# Altium PCB LASER_EXT_V1.1.0.PcbDoc
Units mm, origin at the board's own origin, x right, y up, seen from the top; angles counter-clockwise.
Board outline 35.5 x 54.5 mm, 2 copper layers (Top Layer, Bottom Layer); 39 components, 23 nets, 234 pads, 84 vias.
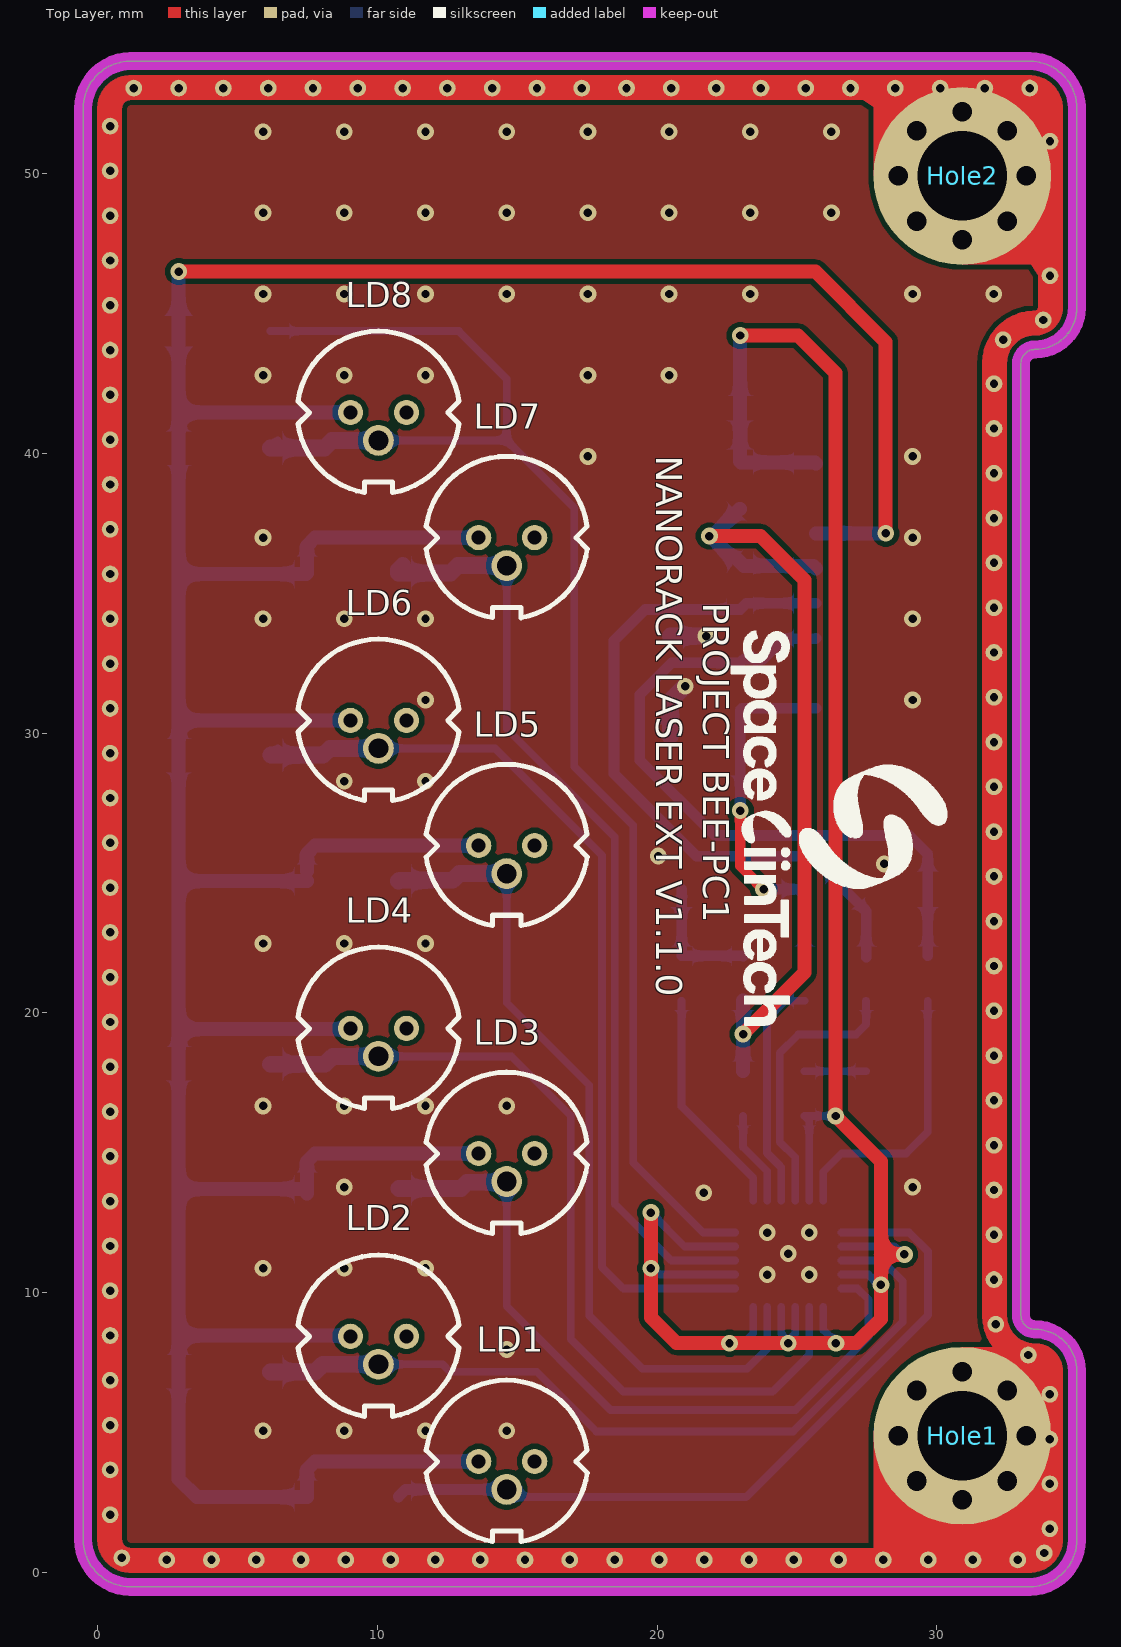
[diagram p0: Top Layer view]
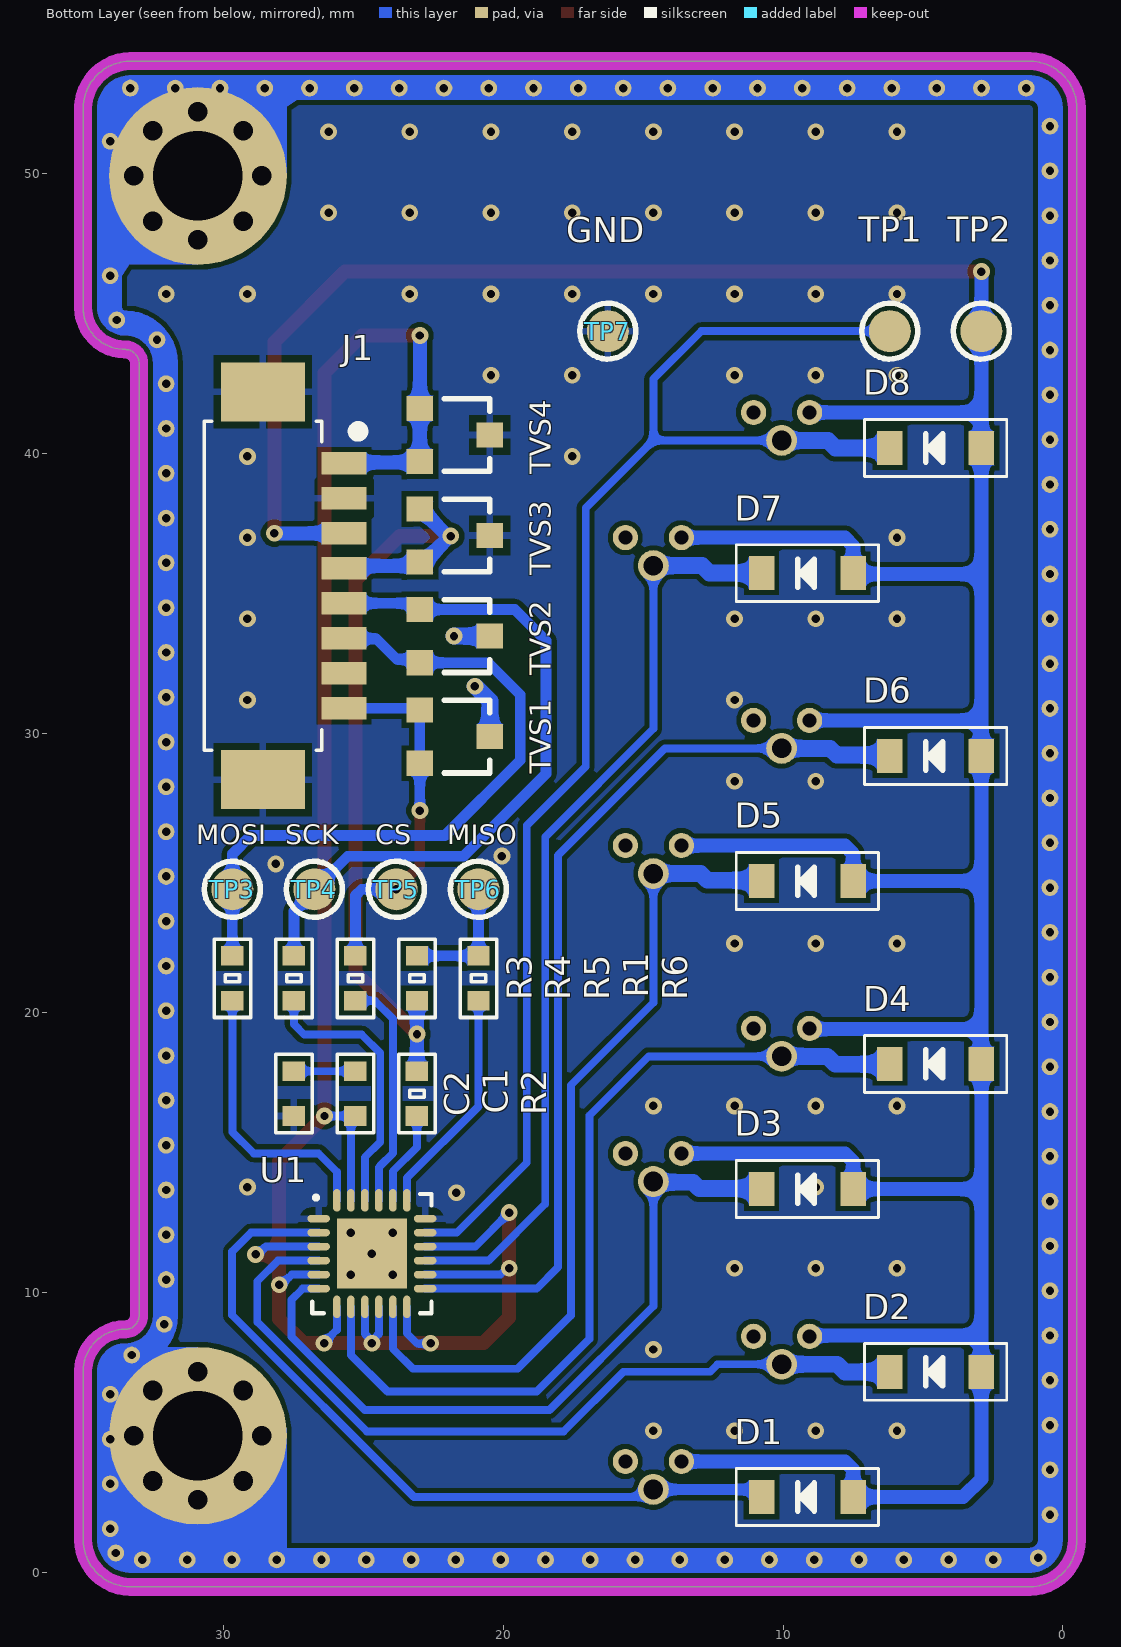
[diagram p1: Bottom Layer view, seen from below]
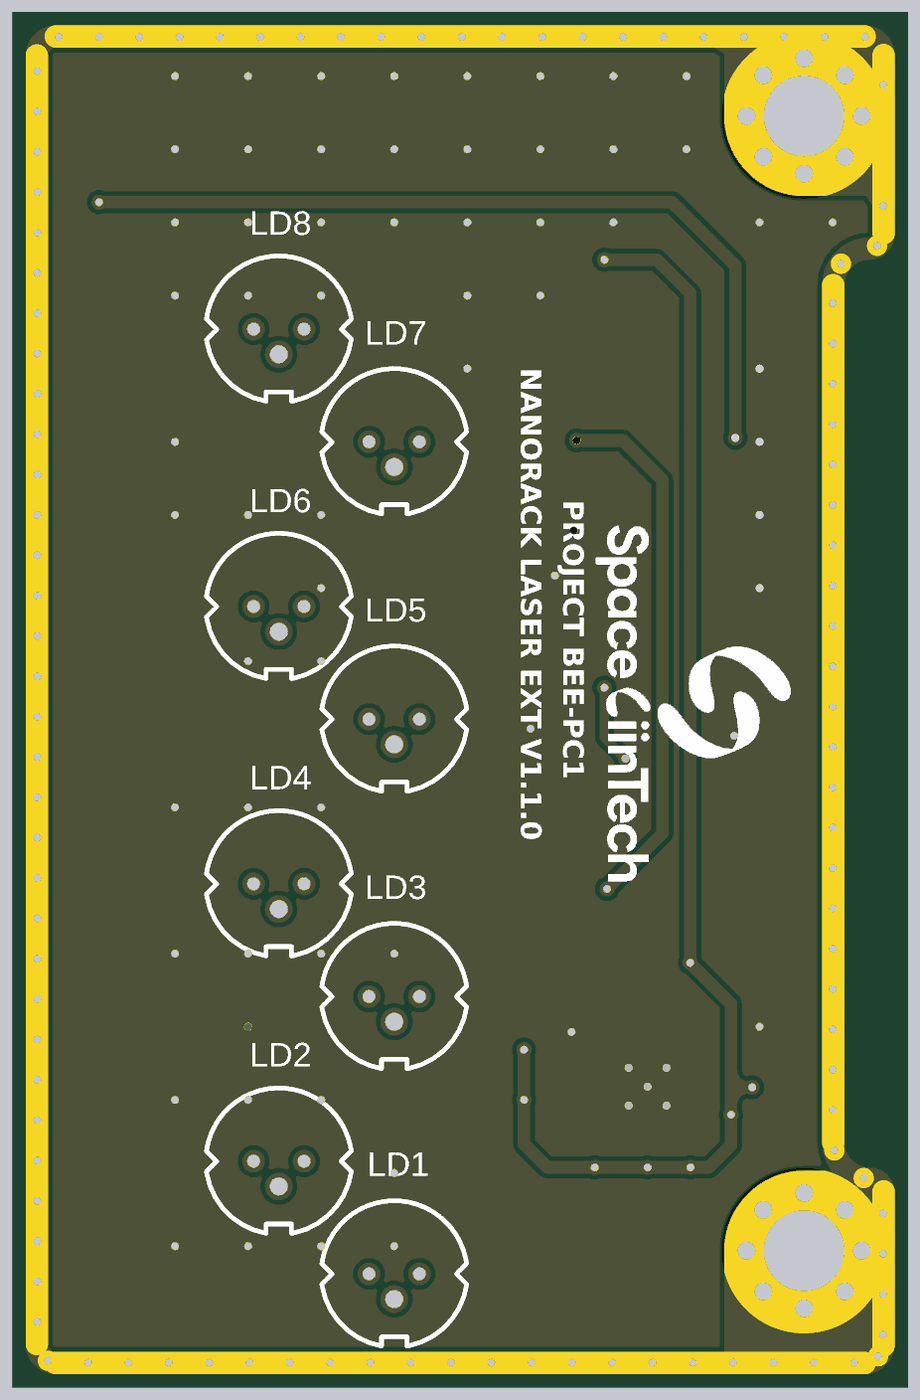
[diagram p2: 3D render of the assembled board from above, using the file's embedded part models]
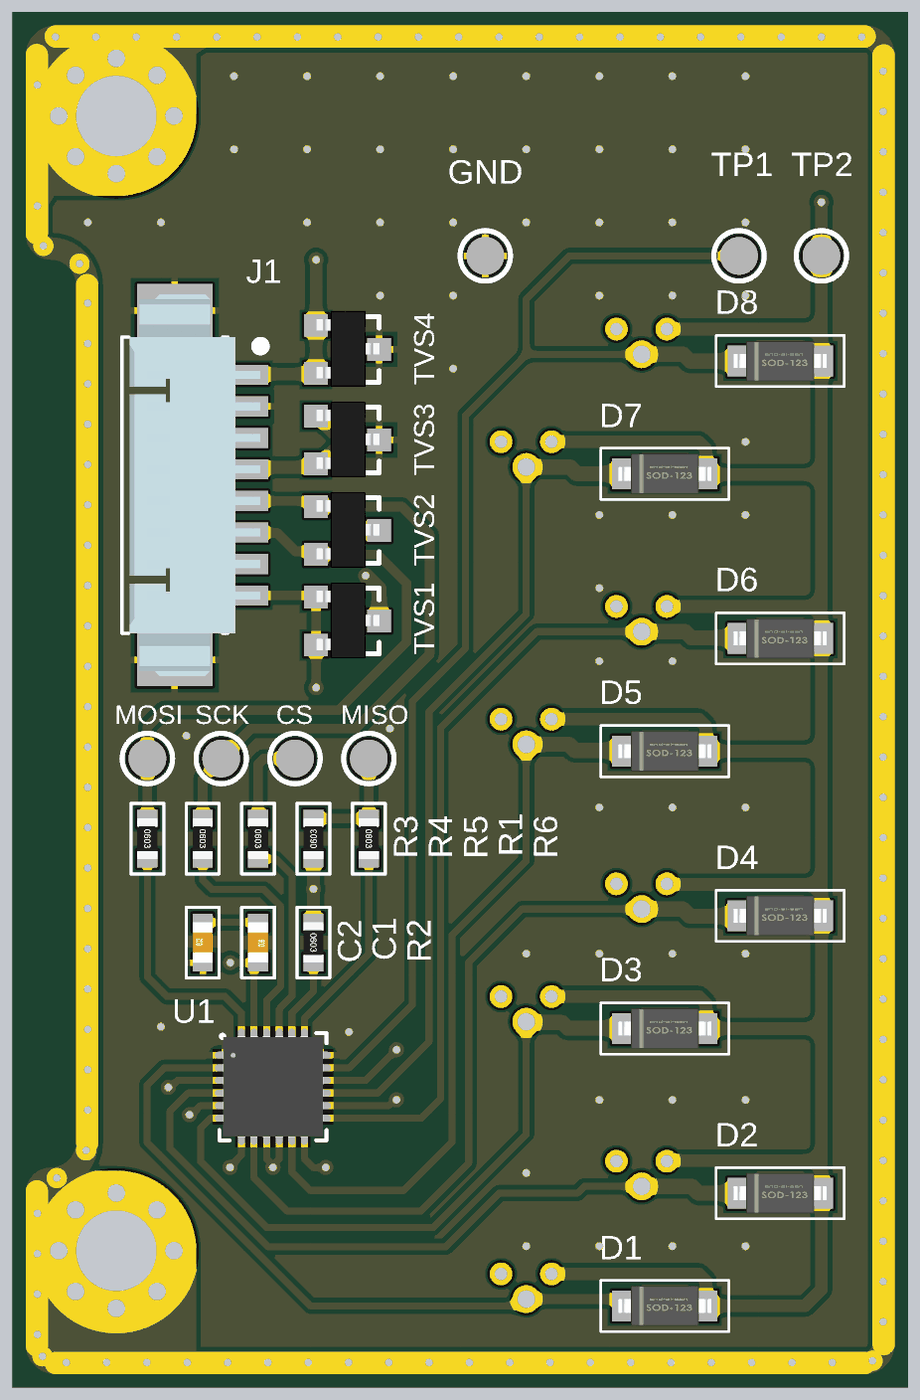
[diagram p3: 3D render of the assembled board from below, using the file's embedded part models]

## Layer stack, top to bottom
Top Solder: solder mask 0.0102, Solder Resist, Dk 3.5
Top Layer: signal copper 0.0356
Dielectric 1: dielectric 0.32, FR-4, Dk 4.8
Bottom Layer: signal copper 0.0356
Bottom Solder: solder mask 0.0102, Solder Resist, Dk 3.5

## Board outline
-0.5,1.2 ccw(c1.2,1.2) 1.2,-0.5 33.3,-0.5 ccw(c33.3,1.2) 35,1.2 34.998,1.113 34.998,7.259 cw(c34.999,7.259) 34.999,7.26 35,7.2 ccw(c33.5,7.2) 33.5,8.7 cw(c33.5,9.2) 33,9.2 33,43.19 33,43.2 cw(c33.5,43.2) 33.499,43.7 33.5,43.7 ccw(c33.5,45.2) 35,45.2 35,45.176 35,52.399 ccw(c34.997,52.399) 34.997,52.402 35,52.3 ccw(c33.3,52.3) 33.3,54 1.2,54 ccw(c1.2,52.3) -0.5,52.3

## Design rules (kind name [scope] priority, off if disabled: settings)
Clearance [NOT InNet('PROTECT_EMI') and NOT OnLayer('Keep-Out Layer')] p1: gap=0.178 ignorepadtopadclearanceinfootprint=TRUE
HoleSize [All] p1: absolutevalues=TRUE maxlimit=3.2 minlimit=0.025 maxpercent=80.000 minpercent=20.000
MinimumSolderMaskSliver [All] p1: minsoldermaskwidth=0.14
PolygonConnect [All] p1: thpad.connectstyle=Relief thpad.reliefconductorwidth=0.254 thpad.reliefentries=4 thpad.polygonreliefangle="90 Angle" thpad.airgapwidth=0.254 smdpad.connectstyle=Relief smdpad.reliefconductorwidth=0.254 smdpad.reliefentries=4 smdpad.polygonreliefangle="90 Angle" smdpad.airgapwidth=0.254 via.connectstyle=Direct via.reliefconductorwidth=0.254 via.reliefentries=4 via.polygonreliefangle="90 Angle" via.airgapwidth=0.254
RoutingVias [All] p1: holewidth=0.3 width=0.7 viastyle="Through Hole" minholewidth=0.3 minwidth=0.6 maxholewidth=0.711 maxwidth=1.27
SilkToSolderMaskClearance [IsPad] p1: minsilkscreentomaskgap=0.15 clearancetoexposedcopper=TRUE
SolderMaskExpansion [All] p1: expansion=0.102 istentingtop=FALSE
Width [All] p1: maxlimit=1.27 minlimit=0.178 preferedwidth=0.381
27 further rules are at their usual default settings.

## Classes and differential pairs
component class COMMUNICATION: Hole1 Hole2 J1 TVS1 TVS2 TVS3 TVS4
component class SWITCHING: C1 C2 D1 D2 D3 D4 D5 D6 D7 D8 LD1 LD2 LD3 LD4 LD5 LD6 LD7 LD8 q R1 R2 R3 R4 R5 R6 TP1 TP2 TP3 TP4 TP5 TP6 TP7 U1

## Components (designator, comment, footprint, x,y, rotation, side; value= is the part's Value field where it differs from the comment)
C1 "0.22uF/25V" CN-SMD-0603 25.272,17.121 r270 bottom value=33pF
C2 "0.22uF/25V" CN-SMD-0603 27.47,17.12 r90 bottom value=33pF
D1 "1N4148W-TP" SOD123 9.13,2.71 r180 bottom value=1N5007
D2 "1N4148W-TP" SOD123 4.55,7.18 r180 bottom value=1N5007
D3 "1N4148W-TP" SOD123 9.13,13.71 r180 bottom value=1N5007
D4 "1N4148W-TP" SOD123 4.55,18.18 r180 bottom value=1N5007
D5 "1N4148W-TP" SOD123 9.13,24.71 r180 bottom value=1N5007
D6 "1N4148W-TP" SOD123 4.55,29.18 r180 bottom value=1N5007
D7 "1N4148W-TP" SOD123 9.13,35.71 r180 bottom value=1N5007
D8 "1N4148W-TP" SOD123 4.55,40.18 r180 bottom value=1N5007
Hole1 "Hole" "Hole space" 30.9,4.9 r0 top
Hole2 "Hole" "Hole space" 30.9,49.9 r0 top
J1 "0532610871" 0532610871 28.579,35.26 r270 bottom
LD1 "LaserDiode" LASER 14.63,3.98 r90 top
LD2 "LaserDiode" LASER 10.05,8.45 r90 top
LD3 "LaserDiode" LASER 14.63,14.98 r90 top
LD4 "LaserDiode" LASER 10.05,19.45 r90 top
LD5 "LaserDiode" LASER 14.63,25.98 r90 top
LD6 "LaserDiode" LASER 10.05,30.45 r90 top
LD7 "LaserDiode" LASER 14.63,36.98 r90 top
LD8 "LaserDiode" LASER 10.05,41.45 r90 top
R1 "4.7K 1%" RES-SMD-0603 23.075,21.238 r90 bottom
R2 "4.7K 1%" RES-SMD-0603 23.076,17.121 r270 bottom
R3 "22R 1%" RES-SMD-0603 29.667,21.239 r270 bottom
R4 "22R 1%" RES-SMD-0603 27.47,21.239 r270 bottom
R5 "22R 1%" RES-SMD-0603 25.273,21.239 r270 bottom
R6 "22R 1%" RES-SMD-0603 20.879,21.239 r270 bottom
TP1 "Test-Point" TESTPOINT 6.185,44.354 r180 bottom
TP2 "Test-Point" TESTPOINT 2.915,44.354 r180 bottom
TP3 "Test-Point" TESTPOINT 29.667,24.418 r0 bottom
TP4 "Test-Point" TESTPOINT 26.738,24.418 r0 bottom
TP5 "Test-Point" TESTPOINT 23.808,24.418 r0 bottom
TP6 "Test-Point" TESTPOINT 20.879,24.418 r0 bottom
TP7 "Test-Point" TESTPOINT 16.256,44.354 r180 bottom
TVS1 "S2303" SOT23-123 21.721,29.87 r270 bottom
TVS2 "S2303" SOT23-123 21.721,33.462 r270 bottom
TVS3 "S2303" SOT23-123 21.721,37.054 r270 bottom
TVS4 "S2312" SOT23-123 21.721,40.645 r270 bottom
U1 "ADG1414BCPZ" ADG1414BCPZ 24.685,11.405 r180 bottom

## Footprints (in the part's own frame and the unit in brackets; to place one, negate y for a bottom-side part, rotate by r counter-clockwise, add the part's x,y. Pads: shape width x height; smd on the part's side, far side on the other; paste and mask are expansions set on the pad)
0532610871 [mm] "CONN HEADER SMD R/A 8POS 1.25MM"
  rect 0.8x1.6 smd: 1(-4.375,2.9) 2(-3.125,2.9) 3(-1.875,2.9) 4(-0.625,2.9) 5(0.625,2.9) 6(1.875,2.9) 7(3.125,2.9) 8(4.375,2.9)
  rect 2.1x3 smd: S1(-6.925,0) S2(6.925,0)
  silkscreen extent -5.87,-2.1 5.87,3.58, body extent -7.57,-1.8 7.57,3.4, height 3.2
ADG1414BCPZ [mm] "IC SW SPST-NOX8 11.5OHM 24LFCSP"
  rrect100% 0.805x0.275 smd mask+0.05: 1(-1.902,1.25) 2(-1.902,0.75) 3(-1.902,0.25) 4(-1.902,-0.25) 5(-1.902,-0.75) 6(-1.902,-1.25) 13(1.902,-1.25) 14(1.902,-0.75) 15(1.902,-0.25) 16(1.902,0.25) 17(1.902,0.75) 18(1.902,1.25)
  rrect100% 0.275x0.805 smd mask+0.05: 7(-1.25,-1.902) 8(-0.75,-1.902) 9(-0.25,-1.902) 10(0.25,-1.902) 11(0.75,-1.902) 12(1.25,-1.902) 19(1.25,1.902) 20(0.75,1.902) 21(0.25,1.902) 22(-0.25,1.902) 23(-0.75,1.902) 24(-1.25,1.902)
  rect 2.5x2.5 smd mask+0.102: HTAB(0,0)
  silkscreen extent -2.13,-2.13 2.13,2.13, body extent -2,-2 2,2, height 0.6
CN-SMD-0603 [mm]
  rect 0.7x0.8 smd: 1(-0.8,0) 2(0.8,0)
  silkscreen extent -1.4,-0.65 1.4,0.65, body extent -0.8,-0.4 0.8,0.4, height 0.3
"Hole space" [mm]
  round 1 hole 0.7: 1(-2.286,0) 1(-1.616,-1.616) 1(-1.616,1.616) 1(0,-2.286) 1(0,2.286) 1(1.616,-1.616) 1(1.616,1.616) 1(2.286,0)
  round 6.35 hole 3.2: 1(0,0)
LASER [mm]
  round 1.1 hole 0.7 mask+0.102: 1(-1,0)
  round 0.9 hole 0.5 mask+0.102: 2(0,-1) 3(0,1)
  silkscreen extent -2.86,-2.88 2.9,2.87, body extent -2.76,-2.78 2.8,2.77, height 3.7
RES-SMD-0603 [mm]
  rect 0.7x0.8 smd: 1(-0.8,0) 2(0.8,0)
  silkscreen extent -1.4,-0.65 1.4,0.65, body extent -0.8,-0.4 0.8,0.4, height 0.43
SOD123 [mm]
  rect 0.91x1.22 smd: 1(1.635,0) 2(-1.635,0)
  silkscreen extent -2.54,-1.02 2.54,1.02, body extent -1.85,-0.8 1.85,0.8, height 1.25
SOT23-123 [mm] "SOT23, 1=bottom-left, 2=top, 3=bottom-right"
  rect 0.9x0.95 smd: 1(-0.95,-1.25) 2(0,1.25) 3(0.95,-1.25)
  silkscreen extent -1.3,-0.38 1.3,1.25, body extent -1.52,-1.23 1.48,1.27, height 1.06
TESTPOINT [mm]
  round 1.5 smd: 1(0,0)
  silkscreen extent -1,-1 1,1

## Part data
C1 C2: library part CN, "CAP CER 0.22UF 25V X7R 0603"
D1 D2 D3 D4 D5 D6 D7 D8: library part "Diode SMD", "DIODE STANDARD 100V 150MA SOD123", Code - JEDEC=DO-214-AB, Published=8-Jun-2000, Publisher="Altium Limited", Revision="July-2002: Re-released for DXP Platform."
J1: library part "Header8 - Shield", "CONN HEADER SMD R/A 8POS 1.25MM"
LD1 LD2 LD3 LD4 LD5 LD6 LD7 LD8: library part LD
R1 R2: library part Res-SMD, "RES SMD 4.7K OHM 1% 1/10W 0603", Manufacturer="Generic Components", Class=Passive, Published=08/06/2000, Publisher="Altium Hobart Technology Centre"
R3 R4 R5 R6: library part Res-SMD, "Resistor", Manufacturer="Generic Components", Class=Passive, Published=08/06/2000, Publisher="Altium Hobart Technology Centre"
TVS1 TVS2 TVS3: "TVS DIODE 3.3VWM 8VC SOT233"
TVS4: library part S2315, "TVS DIODE 12VWM 19VC SOT233"
U1: "IC SW SPST-NOX8 11.5OHM 24LFCSP"

## Free pads (board coordinates)
  round 0.6 hole 0.3: 1(0.464,2.078) 1(0.464,3.678) 1(0.464,5.278) 1(0.464,6.878) 1(0.464,8.478) 1(0.464,10.078) 1(0.464,11.678) 1(0.464,13.278) 1(0.464,14.878) 1(0.464,16.478) 1(0.464,18.078) 1(0.464,19.678) 1(0.464,21.278) 1(0.464,22.878) 1(0.464,24.478) 1(0.464,26.078) 1(0.464,27.678) 1(0.464,29.278) 1(0.464,30.878) 1(0.464,32.478) 1(0.464,34.078) 1(0.464,35.678) 1(0.464,37.278) 1(0.464,38.878) 1(0.464,40.478) 1(0.464,42.078) 1(0.464,43.678) 1(0.464,45.278) 1(0.464,46.878) 1(0.464,48.478) 1(0.464,50.078) 1(0.464,51.678) 1(0.886,0.535) 1(1.311,53.036) 1(2.484,0.464) 1(2.911,53.036) 1(4.084,0.464) 1(4.511,53.036) 1(5.684,0.464) 1(6.111,53.036) 1(7.284,0.464) 1(7.711,53.036) 1(8.884,0.464) 1(9.311,53.036) 1(10.484,0.464) 1(10.911,53.036) 1(12.084,0.464) 1(12.511,53.036) 1(13.684,0.464) 1(14.111,53.036) 1(15.284,0.464) 1(15.711,53.036) 1(16.884,0.464) 1(17.311,53.036) 1(18.484,0.464) 1(18.911,53.036) 1(20.084,0.464) 1(20.511,53.036) 1(21.684,0.464) 1(22.111,53.036) 1(23.284,0.464) 1(23.711,53.036) 1(24.884,0.464) 1(25.311,53.036) 1(26.484,0.464) 1(26.911,53.036) 1(28.084,0.464) 1(28.511,53.036) 1(29.684,0.464) 1(30.111,53.036) 1(31.284,0.464) 1(31.711,53.036) 1(32.036,10.477) 1(32.036,12.077) 1(32.036,13.677) 1(32.036,15.277) 1(32.036,16.877) 1(32.036,18.477) 1(32.036,20.077) 1(32.036,21.677) 1(32.036,23.277) 1(32.036,24.877) 1(32.036,26.477) 1(32.036,28.077) 1(32.036,29.677) 1(32.036,31.277) 1(32.036,32.877) 1(32.036,34.477) 1(32.036,36.077) 1(32.036,37.677) 1(32.036,39.277) 1(32.036,40.877) 1(32.036,42.477) 1(32.1,8.878) 1(32.362,44.043) 1(32.884,0.464) 1(33.265,7.781) 1(33.311,53.037) 1(33.796,44.752) 1(33.833,0.711) 1(34.033,1.578) 1(34.033,3.178) 1(34.033,4.778) 1(34.033,6.378) 1(34.035,46.334) 1(34.035,51.134)

## Via types
v1: diameter 0.6, hole 0.3, Top Layer to Bottom Layer, tented both sides, 84 vias

## Nets (pads, with @x,y where several pads share a name; then routed paths per layer and width w, separated by ;. In a path a pad name is that pad's centre, name@x,y a point inside that pad or via, vN(x,y) a via of type N, cw(c..) or ccw(c..) an arc to the next point about the centre after c; other vN are vias at no path point)
12V_EXP: C1.2 J1.1 TVS4.1 TVS4.3 U1.3 U1.5 U1.7 U1.9 U1.10 U1.12 U1.14 U1.16 U1.23 | length 80.1
  Top Layer w0.5: v1(19.78,12.871) v1(19.78,10.883) 19.78,9.125 20.701,8.204 v1(24.685,8.204) v1(26.391,8.204) 27.126,8.204 27.997,9.075 v1(27.997,10.294) 27.997,11.377 ; v1(22.971,44.2) 25.043,44.2 26.377,42.866 v1(26.377,16.321) 27.997,14.7 27.997,11.377 ; v1(28.837,11.377) 27.997,11.377
  Bottom Layer w0.279: v1(19.78,10.883) 19.866,10.883 20.095,10.655 U1.14 ; v1(19.78,12.871) 20.996,11.655 U1.16 ; v1(22.588,8.204) 22.603,8.189 23.061,8.189 23.435,8.563 U1.12 ; U1.10 24.435,8.541 v1@24.685,8.291 ; v1(24.685,8.204) v1@24.685,8.291 ; U1.9 24.935,8.541 v1@24.685,8.291 ; U1.23 25.435,16.158 C1.2 v1(26.377,16.321) ; U1.7 25.935,8.681 26.391,8.225 v1(26.391,8.204) ; U1.5 27.55,10.655 27.911,10.294 v1(27.997,10.294) ; U1.3 28.473,11.655 28.75,11.377 v1(28.837,11.377)
  Bottom Layer w0.5: v1(22.971,44.2) TVS4.1 TVS4.3 23.001,39.665 25.649,39.665 J1.1
+3.3: J1.4 R1.1 R2.1 TVS3.1 TVS3.3 | length 29.5
  Top Layer w0.5: v1(21.869,37.033) 23.7,37.033 25.273,35.46 25.273,21.443 v1(23.075,19.246)
  Bottom Layer w0.5: TVS3.1 22.946,38.004 21.994,37.052 21.889,37.052 v1(21.869,37.033) 21.895,37.033 22.625,36.304 22.771,36.304 23.104,35.97 25.594,35.97 J1.4 ; R2.1 v1(23.075,19.246) R1.1@23.075,20.437
GND: C2.1 J1.2 J1.S1 J1.S2 TP7.1 TVS1.2 TVS2.2 TVS3.2 TVS4.2 U1.1 U1.18 U1.HTAB | length 3.3
  Bottom Layer w0.6: TVS1.2 20.471,31.139 v1(21.006,31.674) ; TVS2.2 v1(21.753,33.462)
  other v1: 5.93,5.08 8.83,5.08 11.73,5.08 14.63,5.08 14.63,7.98 23.935,10.655 25.435,10.655 5.93,10.88 8.83,10.88 11.73,10.88 24.685,11.405 23.935,12.155 25.435,12.155 21.666,13.575 8.83,13.78 29.13,13.78 5.93,16.68 8.83,16.68 11.73,16.68 14.63,16.68 5.93,22.48 8.83,22.48 11.73,22.48 28.118,25.324 20.041,25.603 8.83,28.28 11.73,28.28 11.73,31.18 29.13,31.18 5.93,34.08 8.83,34.08 11.73,34.08 29.13,34.08 5.93,36.98 29.13,36.98 17.53,39.88 29.13,39.88 5.93,42.78 8.83,42.78 11.73,42.78 17.53,42.78 20.43,42.78 5.93,45.68 8.83,45.68 11.73,45.68 14.63,45.68 17.53,45.68 20.43,45.68 23.33,45.68 29.13,45.68 32.03,45.68 5.93,48.58 8.83,48.58 11.73,48.58 14.63,48.58 17.53,48.58 20.43,48.58 23.33,48.58 26.23,48.58 5.93,51.48 8.83,51.48 11.73,51.48 14.63,51.48 17.53,51.48 20.43,51.48 23.33,51.48 26.23,51.48
I_LD_EXT: D1.1 D2.1 D3.1 D4.1 D5.1 D6.1 D7.1 D8.1 J1.3 LD1.3 LD2.3 LD3.3 LD4.3 LD5.3 LD6.3 LD7.3 LD8.3 TP2.1 | length 148.3
  Top Layer w0.5: v1(2.915,46.482) 25.654,46.482 28.169,43.967 v1(28.169,37.135)
  Bottom Layer w0.5: v1(2.915,46.482) TP2.1 2.915,41.45 ; D7.1@7.463,35.678 2.915,35.678 ; D3.1@7.495,13.555 7.495,14.687 7.788,14.98 LD3.3@13.36,14.98 ; D3.1 2.915,13.71 ; D5.1 2.915,24.71 ; D5.1@7.495,25.07 7.495,25.687 7.788,25.98 LD5.3@13.36,25.98 ; D7.1 7.495,36.687 7.788,36.98 LD7.3@13.36,36.98 ; LD6.3@8.75,30.45 2.915,30.45 ; LD2.3@8.752,8.478 2.915,8.478 ; LD4.3@8.752,19.422 2.915,19.422 ; LD8.3@8.773,41.45 2.915,41.45 ; LD1.3@13.36,3.98 7.788,3.98 7.495,3.687 D1.1 3.564,2.71 2.915,3.359 D2.1 2.915,8.478 ; J1.3 v1(28.169,37.135) ; 2.915,8.478 2.915,13.71 ; 2.915,13.71 D4.1 2.915,19.422 ; 2.915,19.422 2.915,24.71 ; 2.915,24.71 D6.1 2.915,30.45 ; 2.915,30.45 2.915,35.678 ; 2.915,35.678 D8.1 2.915,41.45
MISO_LD: R1.2 R6.1 TP6.1 | length 4.6
  Bottom Layer w0.381: R6.1 R1.2 ; R6.1 TP6.1
MOSI_LD: J1.6 R3.1 TP3.1 TVS2.3 | length 24.8
  Bottom Layer w0.381: J1.6 25.665,33.37 24.531,33.37 23.794,32.633 23.092,32.633 TVS2.3 20.523,32.512 19.38,31.369 19.38,29.032 22.073,26.34 29.007,26.34 29.667,25.679 29.667,24.017 R3.1
NetC1_1: C1.1 C2.2 | length 2.2
  Bottom Layer w0.279: C1.1@25.273,17.92 C2.2@27.469,17.92
NetD1_2: D1.2 LD1.1 U1.2 | length 31
  Bottom Layer w0.279: D1.2@11.035,2.98 LD1.1 ; LD1.1@14.63,2.71 23.182,2.71 29.679,9.206 29.679,11.481 29.005,12.155 U1.2
  Bottom Layer w0.4: D1.2 10.765,2.725 11.02,2.98 LD1.1
NetD2_2: D2.2 LD2.1 U1.4 | length 29.3
  Bottom Layer w0.279: LD2.1 12.337,7.45 12.6,7.186 15.699,7.186 17.831,5.055 24.867,5.055 28.778,8.966 28.778,10.414 28.038,11.155 U1.4
  Bottom Layer w0.6: D2.2 7.79,7.18 8.06,7.45 LD2.1
NetD3_2: D3.2 LD3.1 U1.6 | length 26.3
  Bottom Layer w0.279: D3.2 D3.2@10.873,13.818 ; LD3.1@14.63,13.71 14.63,9.525 18.339,5.817 24.943,5.817 27.559,8.433 27.559,9.754 27.158,10.155 U1.6
  Bottom Layer w0.6: D3.2@10.785,13.73 12.993,13.73 13.214,13.95 LD3.1@14.6,13.95
NetD4_2: D4.2 LD4.1 U1.8 | length 31.4
  Bottom Layer w0.279: D4.2 D4.2@6.268,18.263 ; LD4.1 14.799,18.45 16.916,16.332 16.916,8.357 18.796,6.477 24.13,6.477 25.435,7.782 U1.8
  Bottom Layer w0.6: D4.2@6.196,18.169 8.136,18.169 8.417,18.45 LD4.1
NetD5_2: D5.2 LD5.1 U1.11 | length 29.7
  Bottom Layer w0.279: LD5.1@14.63,24.71 14.63,20.365 17.577,17.418 17.577,9.195 19.482,7.29 23.216,7.29 23.935,8.009 U1.11
  Bottom Layer w0.6: D5.2 10.795,24.74 12.7,24.74 12.94,24.98 LD5.1
NetD6_2: D6.2 LD6.1 U1.13 | length 33.7
  Bottom Layer w0.279: D6.2 6.215,29.21 D6.2@6.455,29.45 ; LD6.1 14.213,29.45 18.034,25.628 18.034,10.922 18.801,10.155 U1.13
  Bottom Layer w0.6: D6.2@6.215,29.21 8.077,29.21 8.317,29.45 LD6.1
NetD7_2: D7.2 LD7.1 U1.15 | length 33.6
  Bottom Layer w0.279: LD7.1@14.63,35.71 14.63,30.15 18.492,26.288 18.492,13.182 20.519,11.155 U1.15
  Bottom Layer w0.6: D7.2@10.92,35.98 10.765,35.825 D7.2 10.767,35.712 12.624,35.712 12.891,35.98 LD7.1
NetD8_2: D8.2 LD8.1 TP1.1 U1.17 | length 52.6
  Bottom Layer w0.279: D8.2 D8.2@6.455,40.45 ; TP1.1 12.923,44.354 14.63,42.647 14.63,40.45 ; LD8.1 14.63,40.45 ; U1.17 21.653,12.155 19.152,14.656 19.152,26.695 17.043,28.804 17.043,38.037 14.63,40.45
  Bottom Layer w0.6: D8.2 8.125,40.18 8.395,40.45 LD8.1
NetR2_2: R2.2 U1.20 | length 3.4
  Bottom Layer w0.279: R2.2 23.076,15.202 23.935,14.343 U1.20
NetR3_2: R3.2 U1.24 | length 10
  Bottom Layer w0.279: U1.24 25.935,14.326 26.596,14.986 28.905,14.986 29.667,15.748 R3.2
NetR4_2: R4.2 U1.22 | length 9.8
  Bottom Layer w0.279: U1.22 24.935,14.841 24.384,15.392 24.384,18.568 25.044,19.228 27.102,19.228 27.47,19.596 R4.2
NetR5_2: R5.2 U1.21 | length 8.3
  Bottom Layer w0.279: U1.21 24.435,14.478 24.393,14.52 24.393,14.532 23.927,14.998 23.927,19.787 24.579,20.439 R5.2
NetR6_2: R6.2 U1.19 | length 8.2
  Bottom Layer w0.279: R6.2 20.879,16.662 23.435,14.106 U1.19
PROTECT_EMI: Hole1.1 Hole2.1 pad.1 | length 346.7
  Top Layer w0.889: 32.056,43.19 32.056,9.2 ccw(c33.5,9.2) 33.5,7.756 cw(c33.5,7.2) 34.053,7.249 34.053,1.142 cw(c33.3,1.2) 33.3,0.445 1.2,0.445 cw(c1.2,1.2) 0.445,1.2 0.445,52.3 cw(c1.2,52.3) 1.2,53.056 33.3,53.056 cw(c33.3,52.3) 34.053,52.358 ; 32.056,43.204 cw(c33.5,43.2) 33.497,44.644 ; 33.501,44.644 ccw(c33.5,45.2) 34.053,45.144 ; 34.052,45.176 cw(c34.997,45.176) 34.055,45.252 34.055,52.316
  Bottom Layer w0.889: 32.056,43.19 32.056,9.2 ccw(c33.5,9.2) 33.5,7.756 cw(c33.5,7.2) 34.053,7.249 34.053,1.142 cw(c33.3,1.2) 33.3,0.445 1.2,0.445 cw(c1.2,1.2) 0.445,1.2 0.445,52.3 cw(c1.2,52.3) 1.2,53.056 33.3,53.056 cw(c33.3,52.3) 34.053,52.358 ; 32.056,43.204 cw(c33.5,43.2) 33.497,44.644 ; 33.501,44.644 ccw(c33.5,45.2) 34.053,45.144 ; 34.052,45.176 cw(c34.997,45.176) 34.055,45.252 34.055,52.316
SCK_LD: J1.5 R4.1 TP4.1 TVS2.1 | length 25.2
  Bottom Layer w0.381: J1.5 23.194,34.635 TVS2.1 19.578,34.412 18.466,33.299 18.466,28.55 21.412,25.603 25.552,25.603 TP4.1 26.738,24.368 27.47,23.635 R4.1@27.47,21.988
SW_EXT_CS: J1.8 R5.1 TP5.1 TVS1.1 TVS1.3 | length 13.1
  Top Layer w0.381: v1(22.971,27.229) 22.971,25.255 v1(23.808,24.418)
  Bottom Layer w0.381: v1(22.971,27.229) TVS1.3 TVS1.1 ; TVS1.1@23.035,30.885 J1.8 ; v1(23.808,24.418) 25.05,24.418 25.273,24.195 R5.1
pads on no net: J1.7 LD1.2 LD2.2 LD3.2 LD4.2 LD5.2 LD6.2 LD7.2 LD8.2

## Polygon pours and split planes (outlines as drawn)
GND on Top Layer "GND_L01_P000" (solid, pour order 0): -0.5,1.2 ccw(c1.2,1.2) 1.2,-0.5 33.3,-0.5 ccw(c33.3,1.2) 35,1.2 34.998,1.113 34.998,7.259 cw(c34.999,7.259) 34.999,7.26 35,7.2 ccw(c33.5,7.2) 33.5,8.7 cw(c33.5,9.2) 33,9.2 33,43.19 33,43.2 cw(c33.5,43.2) 33.499,43.7 33.5,43.7 ccw(c33.5,45.2) 35,45.2 35,45.176 35,52.399 ccw(c34.997,52.399) 34.997,52.402 35,52.3 ccw(c33.3,52.3) 33.3,54 1.2,54 ccw(c1.2,52.3) -0.5,52.3
GND on Bottom Layer "GND_L02_P001" (solid, pour order 1): -0.5,1.2 ccw(c1.2,1.2) 1.2,-0.5 33.3,-0.5 ccw(c33.3,1.2) 35,1.2 34.998,1.113 34.998,7.259 cw(c34.999,7.259) 34.999,7.26 35,7.2 ccw(c33.5,7.2) 33.5,8.7 cw(c33.5,9.2) 33,9.2 33,43.19 33,43.2 cw(c33.5,43.2) 33.499,43.7 33.5,43.7 ccw(c33.5,45.2) 35,45.2 35,45.176 35,52.399 ccw(c34.997,52.399) 34.997,52.402 35,52.3 ccw(c33.3,52.3) 33.3,54 1.2,54 ccw(c1.2,52.3) -0.5,52.3

## Keep-outs
Keep-Out Layer:
  lines w0.644: 33,43.19 33,9.2 ccw(c33.5,9.2) 33.5,8.7 cw(c33.5,7.2) 35,7.2 ; 33,43.2 cw(c33.5,43.2) 33.499,43.7 ; 33.5,43.7 ccw(c33.5,45.2) 35,45.2 ; 34.997,45.176 ccw(c35,45.176) 35,45.173 ; 34.997,52.402 cw(c34.997,52.399) 35,52.399 35,45.176 ; 34.997,52.405 cw(c34.997,52.402) 35,52.402 ; 34.998,1.113 34.998,7.259 cw(c34.999,7.259) 34.999,7.26 ; 35,1.2 cw(c33.3,1.2) 33.3,-0.5 1.2,-0.5 cw(c1.2,1.2) -0.5,1.2 -0.5,52.3 cw(c1.2,52.3) 1.2,54 33.3,54 cw(c33.3,52.3) 35,52.3

## Other copper
Top Layer:
  rectangle net PROTECT_EMI: 30.836,3.489 33.706,8.077
  rectangle net PROTECT_EMI: 30.9,46.736 34.055,48.6
  rectangle net PROTECT_EMI: 27.725,49.9 34.055,53.056
  rectangle net PROTECT_EMI: 27.725,0.445 31.648,5.055
  rectangle net PROTECT_EMI: 30.9,0.445 34.053,6.775
Bottom Layer:
  rectangle net PROTECT_EMI: 27.725,49.9 34.055,53.056
  region net PROTECT_EMI: 33.731,4.382 33.731,8.077 30.9,8.077 30.9,4.382
  rectangle net PROTECT_EMI: 27.725,0.445 30.9,5.182
  rectangle net PROTECT_EMI: 30.9,0.445 34.053,6.775
  rectangle net PROTECT_EMI: 30.9,46.736 34.055,48.6

## Silkscreen, mask and mechanical layers (free items; w line width, h text height)
Top Overlay:
  drawing of 17 lines, arcs and shapes, not listed
  text "NANORACK LASER EXT V1.1.0" at 19.66,39.907 h1.6 r270
  text "PROJECT BEE-PC1" at 21.336,34.661 h1.6 r270
Bottom Overlay:
  text "GND" at 17.745,47.223 h1.52
  text "MISO" at 21.996,25.794 h1.2
  text "CS" at 24.562,25.794 h1.2
  text "SCK" at 27.788,25.794 h1.2
  text "MOSI" at 30.963,25.794 h1.2

## Text inside footprints (layer, text, board x,y; h text height)
U1: Mechanical 13 "*" at 26.118,12.496 h0.64 r270